# Altium PCB rs232Shield.PcbDoc
Units mm, origin at the board's own origin, x right, y up, seen from the top; angles counter-clockwise.
Board outline 67.89 x 33.03 mm, 2 copper layers (Top Layer, Bottom Layer); 10 components, 12 nets, 81 pads, 2 vias.
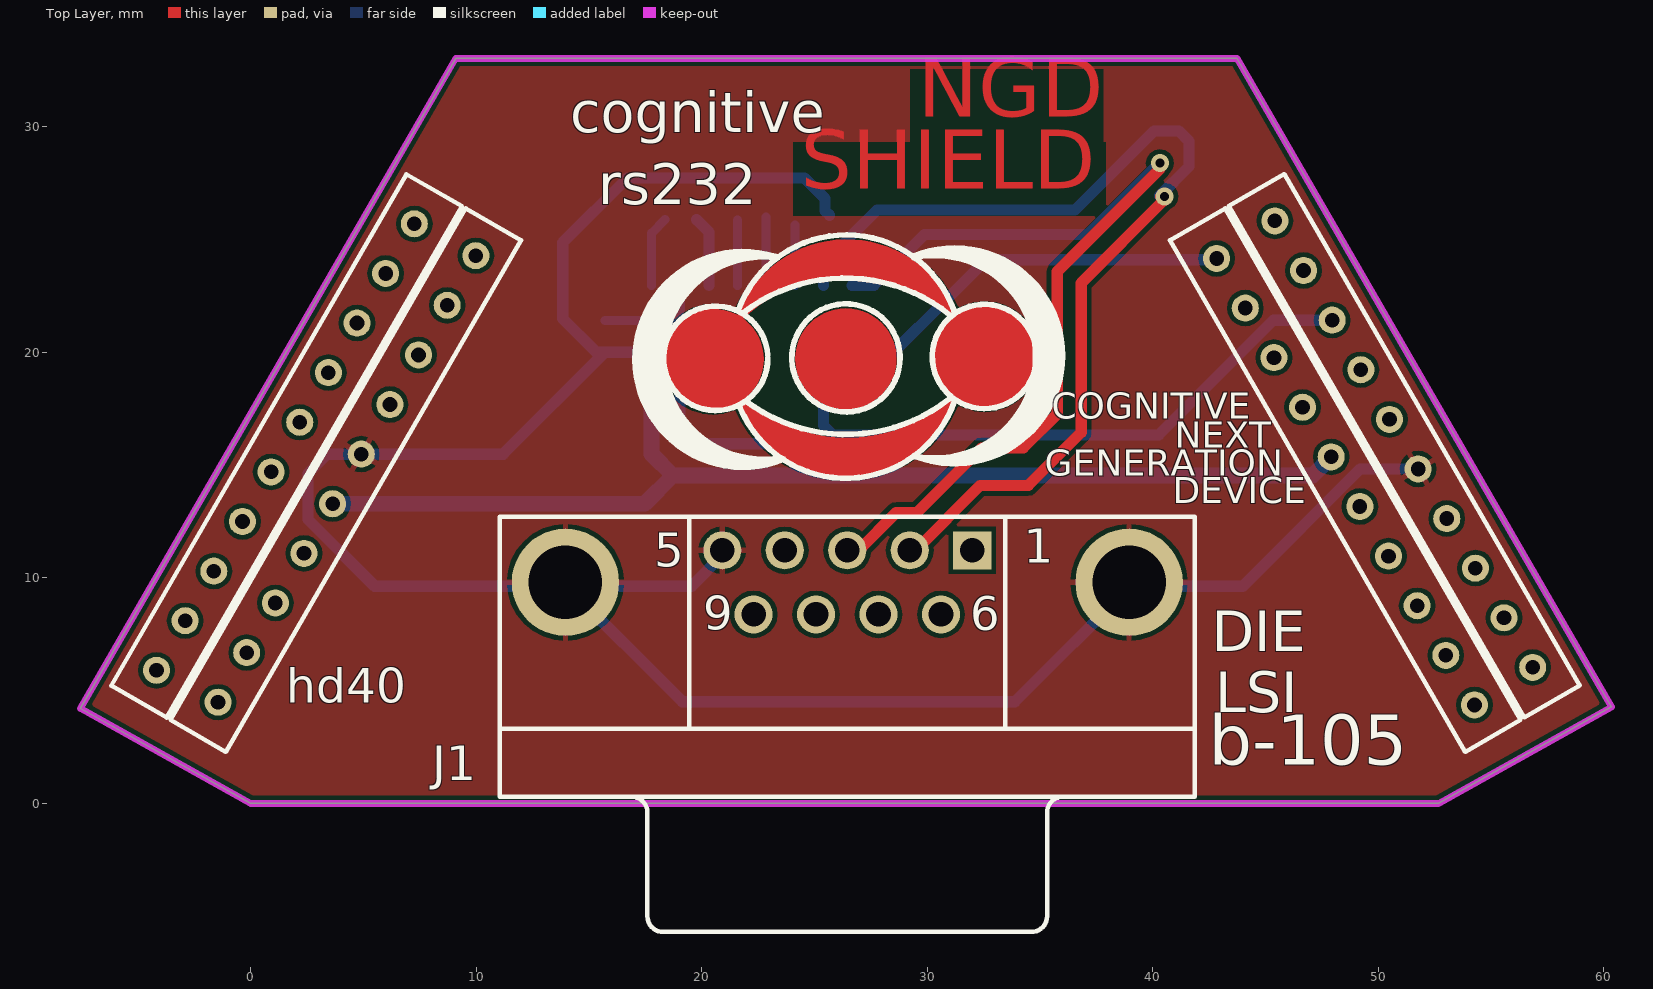
[diagram p0: Top Layer view]
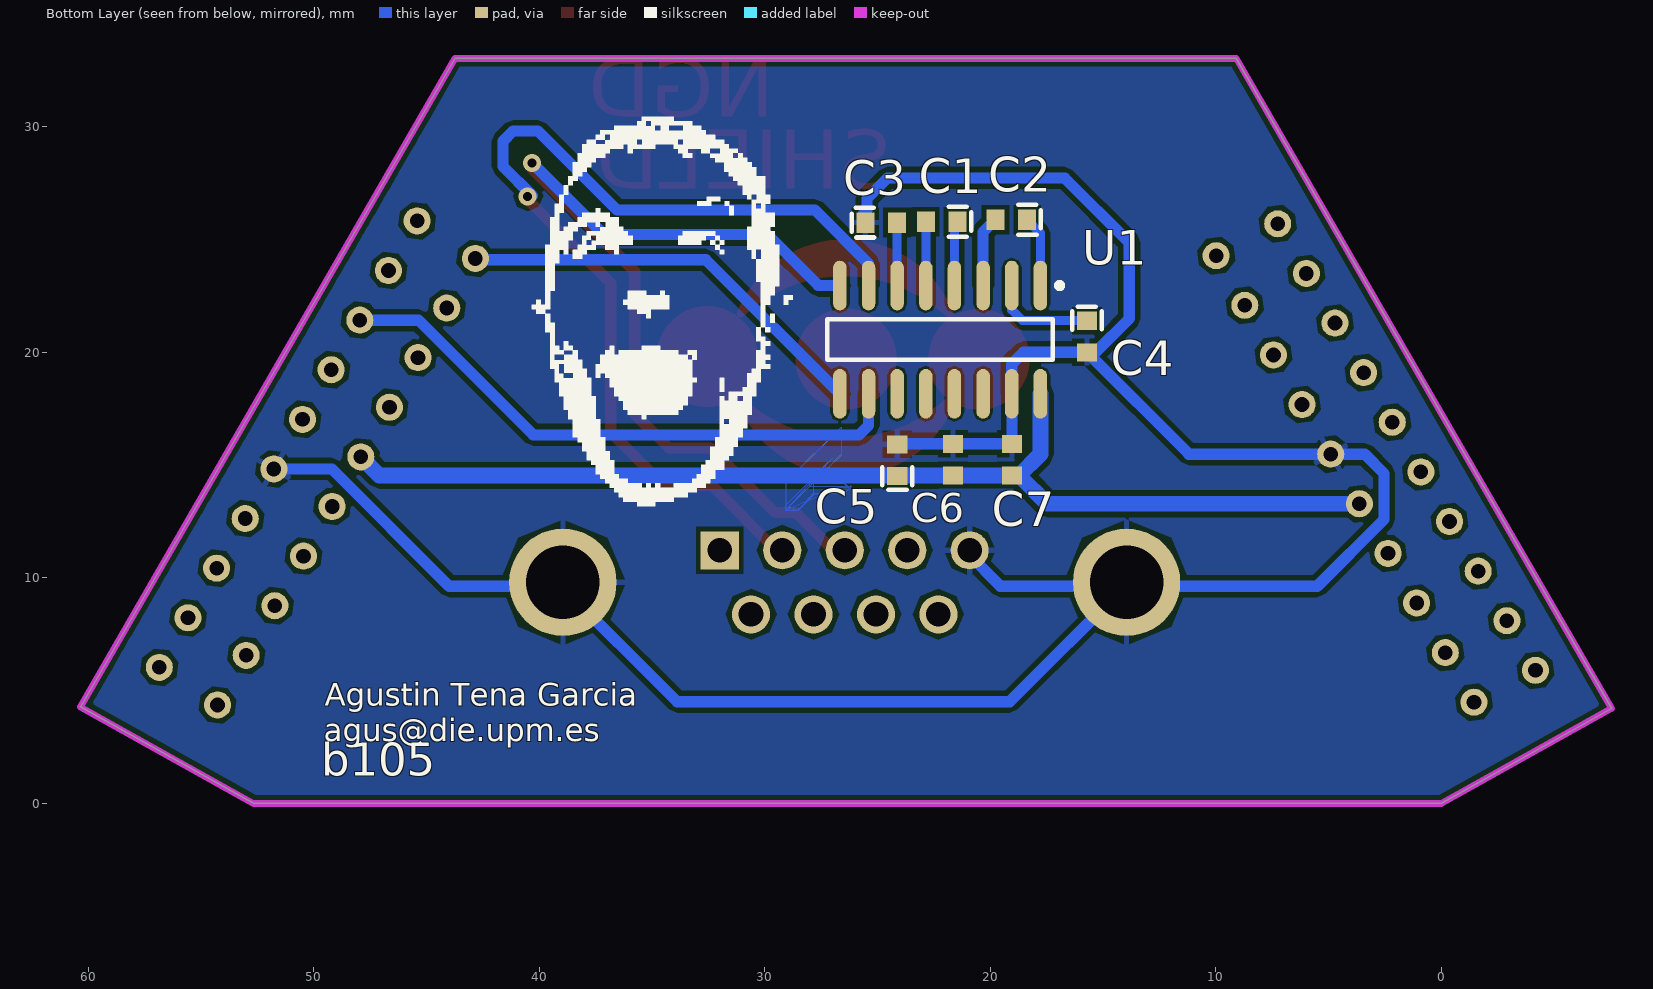
[diagram p1: Bottom Layer view, seen from below]

## Layer stack, top to bottom
Top Layer: signal copper 0.0356
Dielectric: dielectric 0.32, FR-4, Dk 4.8
Bottom Layer: signal copper 0.0356

## Board outline
0,0 52.671,0 60.341,4.281 60.335,4.277 43.733,33.03 9.093,33.03 -7.547,4.212 -7.536,4.206

## Design rules (kind name [scope] priority, off if disabled: settings)
Clearance pic_clearance [InComponent('U1')] p1: gap=0.1
Clearance [All] p2: gap=0.2
PolygonConnect [All] p1: connectstyle=Relief reliefconductorwidth=0.254 reliefentries=4 polygonreliefangle="90 Angle"
RoomDefinition RS232 [InComponentClass('RS232')] p1 off: confinementstyle=ConfineIn formatcopy=TRUE lockcomponents=FALSE outline -143.347,-198.98 -92.547,-198.98 -92.547,-173.58 -143.347,-173.58
RoutingVias [All] p1: holewidth=0.4 width=0.8 viastyle="Through Hole" minholewidth=0 minwidth=0.6 maxholewidth=1 maxwidth=1.4
SilkscreenOverComponentPads [All] p1: minsilkscreentomaskgap=0.254
SolderMaskExpansion [All] p1: expansion=0.102
Width "VCC 5" [InNet('VCC5.0_POWER')] p1: maxlimit=2 minlimit=0.2 preferedwidth=1.2 minimp=50.000000 maximp=50.000000 favimp=50.000000
Width VCC [InNet('VCC')] p2: maxlimit=2 minlimit=0.2 preferedwidth=1.2
Width GND [InNet('GND')] p3: maxlimit=2 minlimit=0.2 preferedwidth=1.2 minimp=50.000000 maximp=50.000000 favimp=50.000000
Width [All] p4: maxlimit=2 minlimit=0.2 preferedwidth=0.4 minimp=50.000000 maximp=50.000000 favimp=50.000000
27 further rules are at their usual default settings.

## Components (designator, comment, footprint, x,y, rotation, side; value= is the part's Value field where it differs from the comment)
C1 "Cap Pol" "0603[1608] POL" 22.16,25.79 r0 bottom
C2 "Cap Pol" "0603[1608] POL" 19.07,25.88 r0 bottom
C3 "Cap Pol" "0603[1608] POL" 24.84,25.75 r180 bottom
C4 "Cap Pol" "0603[1608] POL" 15.713,20.7 r270 bottom
C5 "Cap Pol" "0603[1608] POL" 24.123,15.22 r90 bottom
C6 "Cap" 1608[0603] 21.653,15.24 r90 bottom
C7 "Cap" 1608[0603] 19.033,15.24 r90 bottom
hd40 "header_cognitiveNGD_shield" header_cognitiveNGD_longlegs 11.083,13.08 r0 top locked
J1 "rs232" DSUB1.385-2H9 26.453,0.3 r180 top
U1 "MAX3232CSE" NSO16_N 22.223,20.56 r270 bottom (schematic designator U?)

## Footprints (in the part's own frame and the unit in brackets; to place one, negate y for a bottom-side part, rotate by r counter-clockwise, add the part's x,y. Pads: shape width x height; smd on the part's side, far side on the other; paste and mask are expansions set on the pad)
"0603[1608] POL" [mm] "Chip Capacitor, Body 1.6x0.8mm, IPC High Density"
  rect 0.8x0.9 smd: 1(-0.7,0) 2(0.7,0)
  silkscreen extent -1.31,-0.66 -0.31,0.66, body extent -0.8,-0.4 0.8,0.4, height 0.3
1608[0603] [mm] "Chip Capacitor, Body 1.6x0.8mm, IPC High Density"
  rect 0.8x0.9 smd: 1(-0.7,0) 2(0.7,0)
  body extent -0.8,-0.4 0.8,0.4, height 0.3
DSUB1.385-2H9 [mm] "Connector; D Subminiature; 9 Position; Right Angle; Pitch 1.385 mm"
  rect 1.69x1.69 hole 1.09: 1(-5.54,-10.92)
  round 1.69 hole 1.09: 2(-2.77,-10.92) 3(0,-10.92) 4(2.77,-10.92) 5(5.54,-10.92) 6(-4.155,-8.08) 7(-1.385,-8.08) 8(1.385,-8.08) 9(4.155,-8.08)
  round 4.76 hole 3.26: 10(-12.495,-9.5) 11(12.495,-9.5)
  silkscreen extent -15.4,-12.4 15.4,6, body extent -15.47,-13.09 15.34,6.11, height 12.25
header_cognitiveNGD_longlegs [mm]
  round 1.2 / inner oval 2.5x1.2 / far side round 1.2 hole 0.65: 00(-3.826,12.617) 01(-5.096,10.417) 02(-6.366,8.217) 03(-7.636,6.018) 04(-8.906,3.818) 05(-10.176,1.618) 06(-11.446,-0.581) 07(-12.716,-2.781) 08(-13.986,-4.981) 09(-15.256,-7.181) 10(-12.527,-8.594) 11(-11.257,-6.395) 12(-9.987,-4.195) 13(-8.717,-1.995) 14(-7.447,0.204) 15(-6.177,2.404) 16(-4.907,4.604) 17(-3.637,6.804) 18(-2.367,9.003) 19(-1.097,11.203) 20(31.747,11.082) 21(33.017,8.882) 22(34.287,6.682) 23(35.557,4.483) 24(36.827,2.283) 25(38.097,0.083) 26(39.367,-2.116) 27(40.637,-4.316) 28(41.907,-6.516) 29(43.177,-8.716) 30(45.761,-7.051) 31(44.491,-4.851) 32(43.221,-2.651) 33(41.951,-0.452) 34(40.681,1.748) 35(39.411,3.948) 36(38.141,6.148) 37(36.871,8.347) 38(35.601,10.547) 39(34.331,12.747)
  silkscreen extent -17.26,-10.79 47.84,14.82, body extent -16.97,-10.43 47.5,14.46, height 7
NSO16_N [mm] "SOIC, 16-Leads, Body 9.9x3.9mm, Pitch 1.27mm, IPC Medium Density"
  oval 2.2x0.6 smd: 1(-2.4,4.445) 2(-2.4,3.175) 3(-2.4,1.905) 4(-2.4,0.635) 5(-2.4,-0.635) 6(-2.4,-1.905) 7(-2.4,-3.175) 8(-2.4,-4.445) 9(2.4,-4.445) 10(2.4,-3.175) 11(2.4,-1.905) 12(2.4,-0.635) 13(2.4,0.635) 14(2.4,1.905) 15(2.4,3.175) 16(2.4,4.445)
  silkscreen extent -2.52,-5 0.9,5.42, body extent -2,-5 2,5, height 1.75

## Part data
C1 C2 C3 C4 C5: "Polarized Capacitor (Surface Mount)"
C6 C7: "Capacitor"
hd40: library part header_cognitiveNGD
J1: library part "D Connector 9", "Receptacle Assembly, 9 Position, Right Angle"
U1: "3.0V TO 5.5V, Low-Power, up to 1Mbps, True RS-232 Transceiver Using Four 0.1µF External Capacitor"

## Via types
v1: diameter 0.8, hole 0.4, Top Layer to Bottom Layer, 2 vias

## Nets (pads, with @x,y where several pads share a name; then routed paths per layer and width w, separated by ;. In a path a pad name is that pad's centre, name@x,y a point inside that pad or via, vN(x,y) a via of type N, cw(c..) or ccw(c..) an arc to the next point about the centre after c; other vN are vias at no path point)
GND: C3.1 C4.2 C5.2 C6.2 C7.2 hd40.15 hd40.34 J1.5 J1.10 J1.11 U1.15 | length 113.9
  Bottom Layer w0.5: J1.5@20.973,11.05 19.553,9.63 J1.11@14.018,9.63 ; C5.2@24.123,15.94 22.143,15.94 C7.2 19.033,18.145 U1.15 19.048,19.485 18.533,20 C4.2 ; C3.1@25.663,26.08 25.47,26.273 25.47,26.82 24.56,27.73 16.703,27.73 13.833,24.86 13.833,21.497 15.33,20 C4.2 ; hd40.34 49.191,14.828 43.993,9.63 39.008,9.63 33.888,4.51 19.138,4.51 J1.11@14.018,9.63 ; J1.11@14.018,9.63 5.503,9.63 2.543,12.59 2.543,14.63 3.397,15.484 hd40.15 11.197,15.484 C4.2
NetC1_1: C1.1 U1.4 | length 2.9
  Bottom Layer w0.4: U1.4 C1.1@21.588,25.875
NetC1_2: C1.2 U1.5 | length 3
  Bottom Layer w0.4: U1.5 C1.2@22.858,26.005
NetC2_1: C2.1 U1.1 | length 3.2
  Bottom Layer w0.4: U1.1 17.778,25.288 C2.1
NetC2_2: C2.2 U1.3 | length 3.1
  Bottom Layer w0.5: C2.2 20.318,25.332 U1.3
NetC3_2: C3.2 U1.6 | length 2.7
  Bottom Layer w0.4: U1.6 C3.2@24.128,25.645
NetC4_1: C4.1 U1.2 | length 4.6
  Bottom Layer w0.4: C4.1 18.563,21.4 19.048,21.885 U1.2
Nethd40_20: hd40.20 U1.9 | length 18.6
  Bottom Layer w0.5: U1.9 32.608,24.1 hd40.20@42.831,24.1
Nethd40_37: hd40.37 U1.10 | length 26.2
  Bottom Layer w0.5: U1.10 25.398,16.762 25.825,16.335 40.258,16.335 45.35,21.427 hd40.37
NetJ1_2: J1.2 U1.7 | length 45
  Top Layer w0.5: J1.2 29.473,11.22 32.343,14.09 34.473,14.09 36.823,16.44 36.823,23.063 40.505,26.745 40.34,26.91 v1(40.51,26.91)
  Bottom Layer w0.5: U1.7 25.398,23.928 27.78,26.31 36.55,26.31 40.05,29.81 41.16,29.81 41.61,29.36 41.61,28.24 40.31,26.94 40.34,26.91 v1(40.51,26.91)
NetJ1_3: J1.3 U1.8 | length 40.7
  Top Layer w0.5: J1.3 26.943,11.22 28.623,12.9 29.543,12.9 32.403,15.76 34.253,15.76 35.763,17.27 35.763,23.583 40.31,28.13 v1(40.31,28.39)
  Bottom Layer w0.5: U1.8 27.623,22.96 29.883,25.22 37.14,25.22 v1(40.31,28.39)
VCC: C5.1 C6.1 C7.1 hd40.14 hd40.24 U1.16 | length 49.1
  Bottom Layer w0.7: hd40.14 17.468,13.284 C7.1@18.723,14.54 ; U1.16 17.778,15.485 C7.1@18.723,14.54 ; hd40.24 47.088,14.54 25.593,14.54 22.143,14.54 C7.1 C7.1@18.723,14.54
pads on no net: hd40.00 hd40.01 hd40.02 hd40.03 hd40.04 hd40.05 hd40.06 hd40.07 hd40.08 hd40.09 hd40.10 hd40.11 hd40.12 hd40.13 hd40.16 hd40.17 hd40.18 hd40.19 hd40.21 hd40.22 hd40.23 hd40.25 hd40.26 hd40.27 hd40.28 hd40.29 hd40.30 hd40.31 hd40.32 hd40.33 hd40.35 hd40.36 hd40.38 hd40.39 J1.1 J1.4 J1.6 J1.7 J1.8 J1.9 U1.11 U1.12 U1.13 U1.14
copper on no net: | length 47.2
  Top Layer w0.2: 3.447,19.098 3.447,19.324 ; 5.987,23.497 6.44,23.497 ; 7.257,25.697 7.44,25.88 ; 50.132,17.39 50.494,17.028 ; 51.297,8.764 51.721,8.764 ; 54.304,10.161 54.304,10.429
  Top Layer w0.254: 21.688,21.54 cw(c26.434,19.831) 31.111,21.721 ; 21.697,17.772 ccw(c26.374,19.661) 31.12,17.952 ; 21.702,21.526 cw(c26.464,16.761) 31.07,21.677 ; 21.838,17.896 ccw(c26.444,22.811) 31.206,18.047

## Polygon pours and split planes (outlines as drawn)
GND on Bottom Layer "GND" (solid, remove dead copper, pour order 9): -13.31,39.62 -13.31,-10.42 -12.42,-11.31 -10.52,-13.21 72.76,-13.21 72.76,38.6 70.48,40.88
GND on Bottom Layer "GND" (solid, pour order 4): 26.628,16.665 28.908,14.385 29.068,14.385 29.068,12.995 26.578,15.485 26.578,16.665
GND on Bottom Layer "GND" (solid, pour order 6): 29.068,12.995 28.003,14.06 26.183,14.06 26.193,14.07 26.193,14.09 26.193,14.01 26.473,13.73 27.783,13.73 28.518,12.995 29.068,12.995 28.518,12.995 27.833,13.68 27.833,14.42 26.673,14.42 26.183,13.93 27.123,13.93 27.343,13.71 27.353,13.7 27.453,13.7 27.893,13.7 28.013,13.58 28.083,13.51 28.083,13.48 28.083,13.46 28.293,13.25 28.518,13.025 28.518,12.995 28.678,12.995 28.723,13.04 28.768,12.995 29.068,12.995 29.068,13.225 27.023,15.27
GND on Bottom Layer "GND" (solid, pour order 8): 29.068,12.995 28.003,14.06 28.003,14.2 26.493,14.2 26.283,13.99 26.963,13.99 27.153,13.8
GND on Top Layer "Bottom Layer-No Net" (solid, remove dead copper, pour order 7): -11.11,40.86 -11.22,40.75 -11.22,-10.87 -11.11,-10.76 67.38,-10.76 67.27,-10.65 67.27,40.53

## Keep-outs
Keep-Out Layer:
  lines w0.3: -7.547,4.212 9.093,33.03 43.733,33.03 60.335,4.277 ; -7.536,4.206 0,0 52.671,0 60.341,4.281

## Other copper
Top Layer:
  region: 21.579,17.724 ccw(c26.374,19.661) 31.236,17.897 ccw(c26.444,22.811) 31.296,17.957 ccw(c31.206,18.047) 31.333,18.047 ccw(c31.206,18.047) 31.116,18.137 cw(c26.444,22.811) 21.925,17.989 ccw(c21.838,17.896) 21.711,17.898 ccw(c21.697,17.772)
  region: 21.605,21.443 ccw(c21.702,21.526) 21.793,21.436 cw(c26.464,16.761) 30.983,21.584 ccw(c31.07,21.677) 31.181,21.614 ccw(c31.111,21.721) 31.239,21.721 ccw(c31.111,21.721) 31.23,21.768 ccw(c26.434,19.831) 21.568,21.583 ccw(c21.688,21.54)
  region: 32.55,17.567 cw(c32.55,19.807) 30.31,19.807 cw(c32.55,19.807) 32.55,22.047 cw(c32.55,19.807) 34.79,19.807 cw(c32.55,19.807)
  region: 26.394,17.471 cw(c26.394,19.711) 24.154,19.711 cw(c26.394,19.711) 26.394,21.951 cw(c26.394,19.711) 28.634,19.711 cw(c26.394,19.711)
  region: 20.504,17.451 cw(c20.504,19.691) 18.264,19.691 cw(c20.504,19.691) 20.504,21.931 cw(c20.504,19.691) 22.744,19.691 cw(c20.504,19.691)
  text "NGD" at 29.583,29.59 h4.5
  text "SHIELD" at 24.383,26.39 h4.5

## Silkscreen, mask and mechanical layers (free items; w line width, h text height)
Top Overlay:
  region: 29.418,15.261 cw(c29.442,15.386) 29.34,15.462 cw(c29.455,15.406) 29.501,15.524 ccw(c31.212,19.844) 29.599,15.487 ccw(c30.313,19.803) 34.687,19.803 ccw(c30.313,19.803) 29.424,24.086 cw(c29.398,24.211) 29.274,24.184 cw(c29.381,24.253) 29.332,24.371 cw(c31.212,19.844) 36.113,19.844 cw(c31.212,19.844) 29.534,15.24 cw(c30.313,19.803)
  region: 23.499,15.429 cw(c22.783,19.744) 23.353,24.081 ccw(c23.37,24.208) 23.497,24.208 ccw(c23.37,24.208) 23.387,24.334 ccw(c22.783,19.744) 23.327,24.341 ccw(c23.244,24.244) 23.282,24.366 ccw(c21.832,19.684) 23.666,15.14 ccw(c23.619,15.258) 23.746,15.258 ccw(c23.619,15.258) 23.618,15.385 ccw(c23.52,15.304)
  lines w0.254: 21.63,21.891 cw(c26.401,20.117) 31.19,21.84 ; 21.702,17.54 ccw(c26.398,19.504) 31.219,17.871 ; 21.807,21.73 cw(c26.358,15.874) 31.039,21.628 ; 21.963,17.837 ccw(c26.408,23.774) 30.96,17.918 ; 22.928,19.854 ccw(c20.618,19.734) 22.931,19.751 ; 23.244,24.244 ccw(c21.832,19.684) 23.619,15.258 ; 23.37,24.208 ccw(c22.783,19.744) 23.52,15.304 ; 28.788,19.874 ccw(c26.394,19.752) 28.791,19.771 ; 29.381,24.253 cw(c31.212,19.844) 29.455,15.406 ; 29.398,24.211 cw(c30.313,19.803) 29.442,15.386 ; 34.848,19.934 ccw(c32.538,19.814) 34.851,19.831
  text "cognitive" at 14.163,29.75 h1.8
  text "rs232" at 15.403,26.56 h1.8
  text "COGNITIVE" at 35.52,16.65 h2
  text "NEXT" at 40.98,15.38 h2
  text "GENERATION" at 35.21,14.12 h2
  text "DEVICE" at 40.88,12.9 h2
  text "DIE" at 42.61,6.74 h1.8
  text "LSI" at 42.76,4.05 h1.8
  text "b-105" at 42.49,0.98 h3.8
Bottom Overlay:
  drawing of 13 lines, arcs and shapes, not listed
  text "Agustin Tena Garcia" at 49.5,4.34 h1
  text "agus@die.upm.es" at 49.55,2.75 h1
  text "b105" at 49.66,0.73 h2.5
Top Solder:
  region: 21.585,21.497 ccw(c21.682,21.58) 21.772,21.49 cw(c26.444,16.816) 30.963,21.638 ccw(c31.05,21.731) 31.161,21.668 ccw(c31.091,21.775) 31.219,21.775 ccw(c31.091,21.775) 31.209,21.823 ccw(c26.414,19.886) 21.548,21.638 ccw(c21.668,21.594)
  region: 20.484,17.506 cw(c20.484,19.746) 18.244,19.746 cw(c20.484,19.746) 20.484,21.986 cw(c20.484,19.746) 22.724,19.746 cw(c20.484,19.746)
  region: 26.374,17.526 cw(c26.374,19.766) 24.134,19.766 cw(c26.374,19.766) 26.374,22.006 cw(c26.374,19.766) 28.614,19.766 cw(c26.374,19.766)
  region: 32.53,17.621 cw(c32.53,19.861) 30.29,19.861 cw(c32.53,19.861) 32.53,22.101 cw(c32.53,19.861) 34.77,19.861 cw(c32.53,19.861)
  region: 21.559,17.778 ccw(c26.354,19.716) 31.216,17.951 ccw(c26.424,22.866) 31.276,18.011 ccw(c31.186,18.101) 31.313,18.101 ccw(c31.186,18.101) 31.096,18.191 cw(c26.424,22.866) 21.905,18.043 ccw(c21.818,17.95) 21.691,17.953 ccw(c21.677,17.826)
  lines w0.254: 21.668,21.594 cw(c26.414,19.886) 31.091,21.775 ; 21.677,17.826 ccw(c26.354,19.716) 31.1,18.007 ; 21.682,21.58 cw(c26.444,16.816) 31.05,21.731 ; 21.818,17.95 ccw(c26.424,22.866) 31.186,18.101
  text "NGD" at 29.583,29.59 h4.5
  text "SHIELD" at 24.383,26.39 h4.5

## Text inside footprints (layer, text, board x,y; h text height)
J1: Top Overlay "6" at 31.903,7.67 h1.5; Top Overlay "9" at 20.063,7.7 h1.5; Top Overlay "5" at 17.903,10.5 h1.5; Top Overlay "1" at 34.273,10.68 h1.5